# Altium PCB BOOSTXL-K350QVG-S1.PcbDoc (part 2 of 4)
Units mm, origin at the board's own origin, x right, y up, seen from the top; angles counter-clockwise.
Board outline 152.4 x 101.6 mm, 2 copper layers (Top Layer, Bottom Layer); 36 components, 58 nets, 6671 pads, 44 vias.
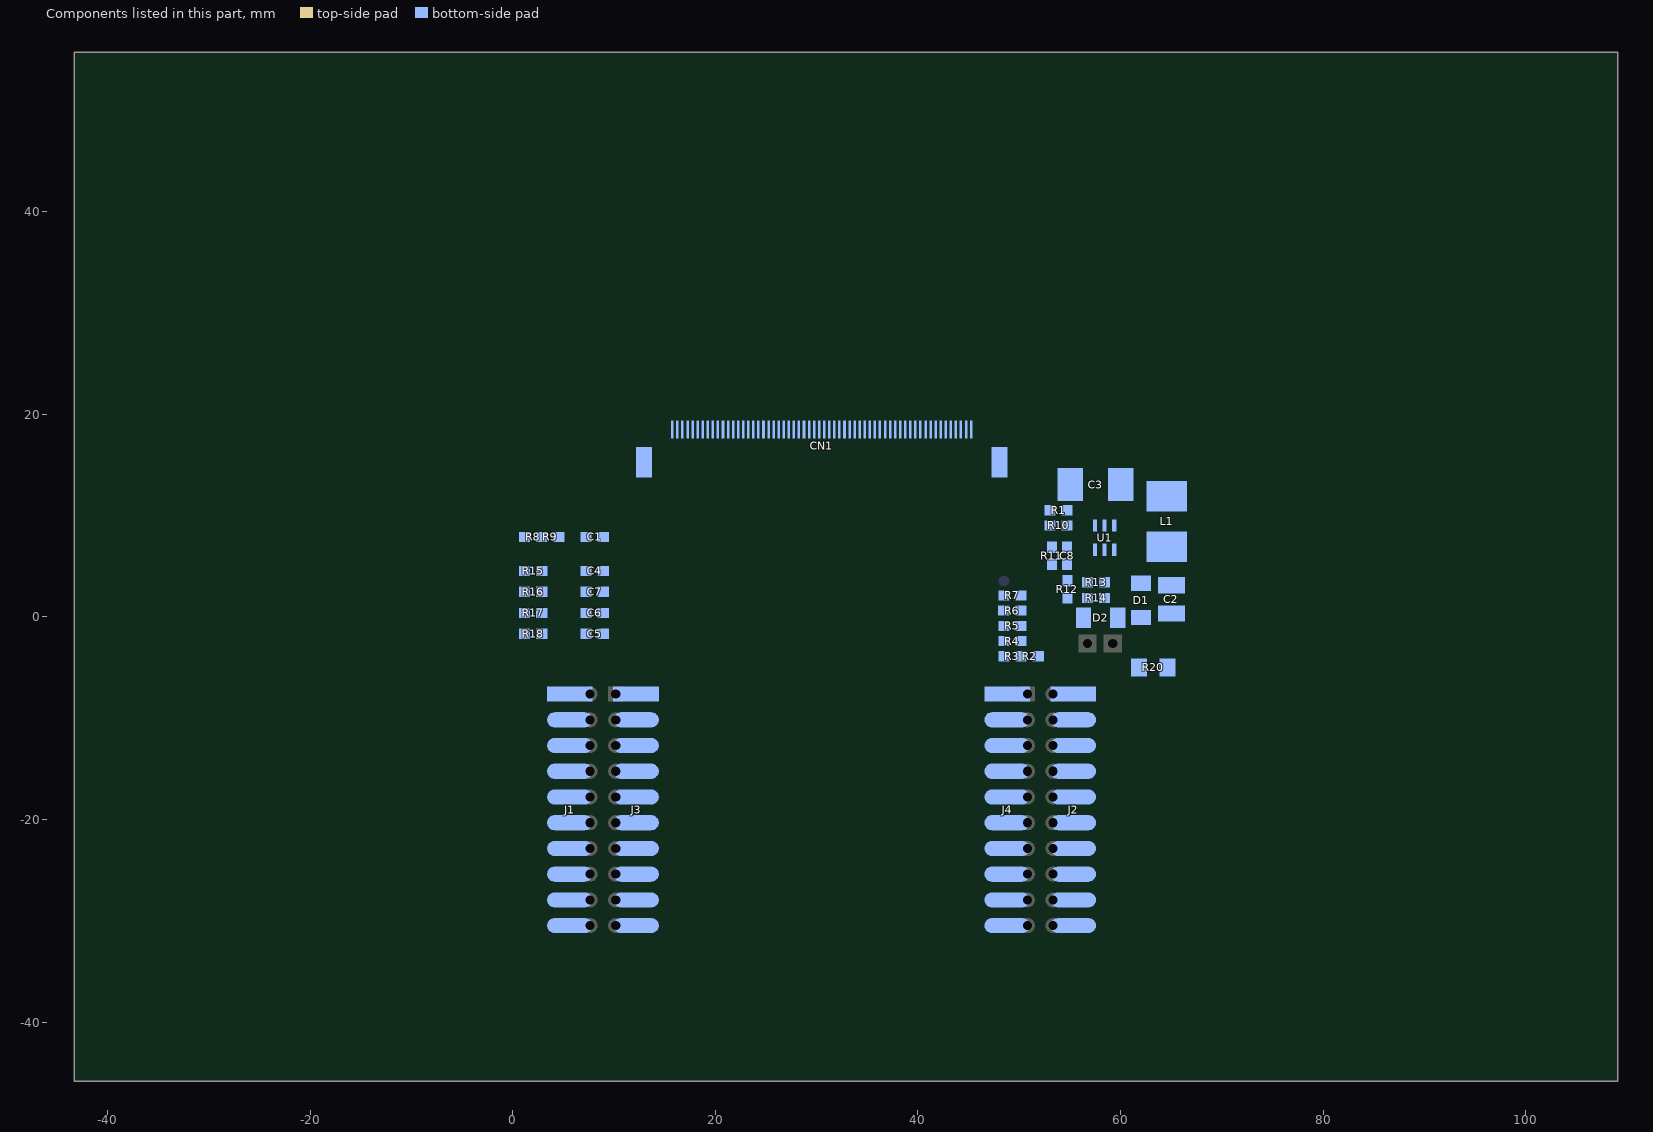
[diagram p2: the components of this part, seen from the top]

## Free pads (board coordinates) (continued)
  round 0.018 on Bottom Overlay: 1(49.907,16.987) 1(49.907,17.004) 1(49.907,17.022) 1(49.907,17.04) 1(49.925,16.969) 1(49.942,16.933) 1(49.942,16.951) 1(49.96,16.915) 1(49.978,16.898) 1(49.996,16.862) 1(49.996,16.88) 1(50.014,16.844) 1(50.031,16.809) 1(50.031,16.827) 1(50.049,16.791) 1(50.067,16.755) 1(50.067,16.773) 1(50.085,16.738) 1(50.102,16.72) 1(50.102,17.04) 1(50.12,16.684) 1(50.12,16.702) 1(50.12,17.004) 1(50.12,17.022) 1(50.138,16.667) 1(50.138,16.969) 1(50.138,16.987) 1(50.156,16.631) 1(50.156,16.649) 1(50.156,16.933) 1(50.156,16.951) 1(50.174,16.595) 1(50.174,16.613) 1(50.174,16.915) 1(50.191,16.578) 1(50.191,16.88) 1(50.191,16.898) 1(50.209,16.542) 1(50.209,16.56) 1(50.209,16.844) 1(50.209,16.862) 1(50.227,16.524) 1(50.227,16.809) 1(50.227,16.827) 1(50.245,16.489) 1(50.245,16.507) 1(50.245,16.791) 1(50.262,16.471) 1(50.262,16.755) 1(50.262,16.773) 1(50.28,15.315) 1(50.28,15.333) 1(50.28,15.351) 1(50.28,15.369) 1(50.28,15.386) 1(50.28,15.404) 1(50.28,16.435) 1(50.28,16.453) 1(50.28,16.72) 1(50.28,16.738) 1(50.298,16.4) 1(50.298,16.418) 1(50.298,16.684) 1(50.298,16.702) 1(50.316,16.382) 1(50.316,16.667) 1(50.322,18.116) 1(50.322,18.133) 1(50.322,19.574) 1(50.322,19.591) 1(50.322,19.609) 1(50.334,16.347) 1(50.334,16.364) 1(50.334,16.631) 1(50.334,16.649) 1(50.34,18.08) 1(50.34,18.098) 1(50.34,18.151) 1(50.34,19.467) 1(50.34,19.485) 1(50.34,19.502) 1(50.34,19.52) 1(50.34,19.538) 1(50.34,19.556) 1(50.351,16.329) 1(50.351,16.595) 1(50.351,16.613) 1(50.358,18.044) 1(50.358,18.062) 1(50.358,19.325) 1(50.358,19.342) 1(50.358,19.36) 1(50.358,19.378) 1(50.358,19.396) 1(50.358,19.414) 1(50.358,19.431) 1(50.358,19.449) 1(50.358,19.627) 1(50.369,16.293) 1(50.369,16.311) 1(50.369,16.578) 1(50.376,18.009) 1(50.376,18.027) 1(50.376,18.151) 1(50.376,19.182) 1(50.376,19.2) 1(50.376,19.218) 1(50.376,19.236) 1(50.376,19.254) 1(50.376,19.271) 1(50.376,19.289) 1(50.376,19.307) 1(50.387,16.258) 1(50.387,16.275) 1(50.387,16.542) 1(50.387,16.56) 1(50.394,17.991) 1(50.405,15.422) 1(50.405,16.222) 1(50.405,16.24) 1(50.405,16.507) 1(50.405,16.524) 1(50.411,18.133) 1(50.411,19.645) 1(50.422,16.204) 1(50.422,16.489) 1(50.429,17.973) 1(50.44,16.169) 1(50.44,16.187) 1(50.44,16.453) 1(50.44,16.471) 1(50.447,18.116) 1(50.458,15.44) 1(50.458,16.133) 1(50.458,16.151) 1(50.458,16.418) 1(50.458,16.435) 1(50.476,15.458) 1(50.476,15.475) 1(50.476,15.493) 1(50.476,15.511) 1(50.476,16.08) 1(50.476,16.098) 1(50.476,16.115) 1(50.476,16.4) 1(50.482,17.956) 1(50.482,19.182) 1(50.482,19.2) 1(50.482,19.218) 1(50.482,19.236) 1(50.482,19.254) 1(50.482,19.271) 1(50.482,19.289) 1(50.482,19.307) 1(50.482,19.325) 1(50.482,19.342) 1(50.482,19.36) 1(50.482,19.662) 1(50.494,15.529) 1(50.494,15.546) 1(50.494,15.564) 1(50.494,15.582) 1(50.494,15.6) 1(50.494,15.618) 1(50.494,15.635) 1(50.494,15.653) 1(50.494,15.671) 1(50.494,15.689) 1(50.494,15.706) 1(50.494,15.724) 1(50.494,15.742) 1(50.494,15.76) 1(50.494,15.778) 1(50.494,15.795) 1(50.494,15.813) 1(50.494,15.831) 1(50.494,15.849) 1(50.494,15.866) 1(50.494,15.884) 1(50.494,15.902) 1(50.494,15.92) 1(50.494,15.938) 1(50.494,15.955) 1(50.494,15.973) 1(50.494,15.991) 1(50.494,16.009) 1(50.494,16.026) 1(50.494,16.044) 1(50.494,16.062) 1(50.494,16.364) 1(50.494,16.382) 1(50.5,18.098) 1(50.5,19.378) 1(50.5,19.396) 1(50.5,19.414) 1(50.511,16.347) 1(50.518,17.938) 1(50.518,19.431) 1(50.529,16.311) 1(50.529,16.329) 1(50.536,18.08) 1(50.536,19.449) 1(50.547,16.275) 1(50.547,16.293) 1(50.554,19.467) 1(50.554,19.68) 1(50.565,16.258) 1(50.571,17.92) 1(50.589,19.485) 1(50.6,16.258) 1(50.6,16.275) 1(50.607,18.062) 1(50.607,19.502) 1(50.618,16.293) 1(50.618,16.311) 1(50.625,17.902) 1(50.625,19.698) 1(50.636,16.329) 1(50.636,16.347) 1(50.642,19.52) 1(50.654,16.364) 1(50.654,16.382) 1(50.671,16.4) 1(50.671,16.418) 1(50.678,19.538) 1(50.689,16.435) 1(50.689,16.453) 1(50.696,17.884) 1(50.696,18.044) 1(50.707,16.471) 1(50.707,16.489) 1(50.725,16.507) 1(50.725,16.524) 1(50.731,19.556) 1(50.742,16.542) 1(50.742,16.56) 1(50.76,16.578) 1(50.76,16.595) 1(50.767,19.716) 1(50.778,16.613) 1(50.778,16.631) 1(50.796,16.649) 1(50.796,16.667) 1(50.802,17.867) 1(50.814,16.684) 1(50.82,19.574) 1(50.831,16.702) 1(50.831,16.72) 1(50.849,15.529) 1(50.849,15.546) 1(50.849,15.564) 1(50.849,15.582) 1(50.849,15.6) 1(50.849,15.618) 1(50.849,15.635) 1(50.849,15.653) 1(50.849,15.671) 1(50.849,15.689) 1(50.849,15.706) 1(50.849,15.724) 1(50.849,15.742) 1(50.849,15.76) 1(50.849,15.778) 1(50.849,15.795) 1(50.849,15.813) 1(50.849,15.831) 1(50.849,15.849) 1(50.849,15.866) 1(50.849,15.884) 1(50.849,15.902) 1(50.849,15.92) 1(50.849,15.938) 1(50.849,15.955) 1(50.849,15.973) 1(50.849,15.991) 1(50.849,16.009) 1(50.849,16.026) 1(50.849,16.738) 1(50.849,16.755) 1(50.867,15.458) 1(50.867,15.475) 1(50.867,15.493) 1(50.867,15.511) 1(50.867,16.044) 1(50.867,16.062) 1(50.867,16.773) 1(50.867,16.791) 1(50.885,15.44) 1(50.885,16.08) 1(50.885,16.098) 1(50.885,16.809) 1(50.885,16.827) 1(50.903,16.115) 1(50.903,16.133) 1(50.903,16.844) 1(50.92,16.151) 1(50.92,16.169) 1(50.92,16.862) 1(50.92,16.88) 1(50.938,15.422) 1(50.938,16.187) 1(50.938,16.204) 1(50.938,16.898) 1(50.956,16.222) 1(50.956,16.24) 1(50.956,16.915) 1(50.956,16.933) 1(50.963,18.044) 1(50.974,16.258) 1(50.974,16.951) 1(50.991,16.275) 1(50.991,16.293) 1(50.991,16.969) 1(51.009,16.311) 1(51.009,16.329) 1(51.009,16.987) 1(51.009,17.004) 1(51.027,16.347) 1(51.027,17.022) 1(51.045,16.364) 1(51.045,16.382) 1(51.045,17.04) 1(51.051,18.062) 1(51.051,19.574) 1(51.063,15.315) 1(51.063,15.333) 1(51.063,15.351) 1(51.063,15.369) 1(51.063,15.386) 1(51.063,15.404) 1(51.063,16.4) 1(51.063,16.418) 1(51.08,16.435) 1(51.08,17.058) 1(51.098,16.453) 1(51.098,16.471) 1(51.098,17.076) 1(51.105,18.08) 1(51.105,19.716) 1(51.116,16.489) 1(51.116,16.507) 1(51.134,16.524) 1(51.134,17.093) 1(51.14,17.867) 1(51.14,19.556) 1(51.151,16.542) 1(51.151,16.56) 1(51.158,18.098) 1(51.169,16.578) 1(51.169,17.093) 1(51.187,16.595) 1(51.187,16.613) 1(51.194,18.116) 1(51.194,19.538) 1(51.205,16.631) 1(51.223,16.649) 1(51.223,16.667) 1(51.229,18.133) 1(51.229,19.52) 1(51.229,19.698) 1(51.24,16.684) 1(51.24,17.076) 1(51.247,17.884) 1(51.247,18.151) 1(51.258,16.702) 1(51.258,16.72) 1(51.265,18.169) 1(51.265,19.502) 1(51.276,16.738) 1(51.283,18.187) 1(51.283,19.485) 1(51.294,16.755) 1(51.3,19.68) 1(51.311,16.773) 1(51.318,17.902) 1(51.318,18.205) 1(51.318,19.467) 1(51.329,16.791) 1(51.329,16.809) 1(51.329,17.058) 1(51.336,18.222) 1(51.336,19.449) 1(51.347,16.827) 1(51.354,18.24) 1(51.354,18.258) 1(51.354,19.431) 1(51.354,19.662) 1(51.365,16.844) 1(51.371,17.92) 1(51.371,18.276) 1(51.371,19.414) 1(51.383,15.298) 1(51.383,15.315) 1(51.383,15.333) 1(51.383,15.351) 1(51.383,15.369) 1(51.383,15.386) 1(51.383,16.862) 1(51.389,18.293) 1(51.389,19.396) 1(51.4,16.88) 1(51.4,17.04) 1(51.407,18.311) 1(51.407,19.378) 1(51.407,19.645) 1(51.425,17.938) 1(51.425,18.329) 1(51.425,18.347) 1(51.425,19.36) 1(51.436,16.898) 1(51.443,18.365) 1(51.443,19.325) 1(51.443,19.342) 1(51.443,19.627) 1(51.46,17.956) 1(51.46,18.382) 1(51.46,18.4) 1(51.46,19.289) 1(51.46,19.307) 1(51.478,18.418) 1(51.478,18.436) 1(51.478,19.254) 1(51.478,19.271) 1(51.478,19.609) 1(51.489,15.404) 1(51.489,17.022) 1(51.496,17.973) 1(51.496,18.453) 1(51.496,18.471) 1(51.496,18.489) 1(51.496,19.218) 1(51.496,19.236) 1(51.514,18.507) 1(51.514,18.525) 1(51.514,18.542) 1(51.514,19.182) 1(51.514,19.2) 1(51.514,19.591) 1(51.525,15.422) 1(51.531,17.991) 1(51.531,18.56) 1(51.531,18.578) 1(51.531,18.596) 1(51.531,19.111) 1(51.531,19.129) 1(51.531,19.147) 1(51.531,19.165) 1(51.543,15.44) 1(51.543,16.915) 1(51.543,16.933) 1(51.543,16.951) 1(51.543,16.969) 1(51.543,16.987) 1(51.543,17.004) 1(51.549,18.613) 1(51.549,18.631) 1(51.549,18.649) 1(51.549,18.667) 1(51.549,18.685) 1(51.549,18.702) 1(51.549,19.022) 1(51.549,19.04) 1(51.549,19.058) 1(51.549,19.076) 1(51.549,19.094) 1(51.549,19.574) 1(51.56,15.458) 1(51.56,15.475) 1(51.567,18.009) 1(51.567,18.72) 1(51.567,18.738) 1(51.567,18.756) 1(51.567,18.773) 1(51.567,18.791) 1(51.567,18.809) 1(51.567,18.827) 1(51.567,18.845) 1(51.567,18.862) 1(51.567,18.88) 1(51.567,18.898) 1(51.567,18.916) 1(51.567,18.933) 1(51.567,18.951) 1(51.567,18.969) 1(51.567,18.987) 1(51.567,19.005) 1(51.578,15.493) 1(51.578,15.511) 1(51.585,18.027) 1(51.585,19.556) 1(51.596,15.529) 1(51.596,15.546) 1(51.603,19.538) 1(51.614,15.564) 1(51.614,15.582) 1(51.614,15.6) 1(51.62,18.044) 1(51.62,19.52) 1(51.631,15.618) 1(51.631,15.635) 1(51.638,18.062) 1(51.649,15.653) 1(51.649,15.671) 1(51.656,18.08) 1(51.656,19.502) 1(51.667,15.689) 1(51.667,15.706) 1(51.667,15.724) 1(51.674,18.098) 1(51.674,19.485) 1(51.685,15.742) 1(51.685,15.76) 1(51.691,18.116) 1(51.691,19.467) 1(51.703,15.778) 1(51.703,15.795) 1(51.709,18.133) 1(51.709,19.449) 1(51.72,15.813) 1(51.72,15.831) 1(51.727,18.151) 1(51.727,19.431) 1(51.738,15.849) 1(51.738,15.866) 1(51.738,15.884) 1(51.745,18.169) 1(51.745,19.414) 1(51.756,15.902) 1(51.756,15.92) 1(51.763,18.187) 1(51.763,18.205) 1(51.763,19.396) 1(51.774,15.938) 1(51.774,15.955) 1(51.78,18.222) 1(51.78,19.36) 1(51.78,19.378) 1(51.792,15.973) 1(51.792,15.991) 1(51.792,16.009) 1(51.798,18.24) 1(51.798,18.258) 1(51.798,19.342) 1(51.809,16.026) 1(51.809,16.044) 1(51.816,18.276) 1(51.816,19.325) 1(51.827,16.062) 1(51.827,16.08) 1(51.834,18.293) 1(51.834,18.311) 1(51.834,19.289) 1(51.834,19.307) 1(51.845,16.098) 1(51.845,16.115) 1(51.845,16.133) 1(51.852,18.329) 1(51.852,18.347) 1(51.852,19.254) 1(51.852,19.271) 1(51.863,16.151) 1(51.863,16.169) 1(51.869,18.365) 1(51.869,18.382) 1(51.869,19.218) 1(51.869,19.236) 1(51.88,16.187) 1(51.88,16.204) 1(51.887,18.4) 1(51.887,18.418) 1(51.887,18.436) 1(51.887,19.182) 1(51.887,19.2) 1(51.898,16.222) 1(51.898,16.24) 1(51.905,18.453) 1(51.905,18.471) 1(51.905,18.489) 1(51.905,19.129) 1(51.905,19.147) 1(51.905,19.165) 1(51.916,16.258) 1(51.916,16.275) 1(51.916,16.293) 1(51.923,18.507) 1(51.923,18.525) 1(51.923,18.542) 1(51.923,18.56) 1(51.923,19.058) 1(51.923,19.076) 1(51.923,19.094) 1(51.923,19.111) 1(51.934,16.311) 1(51.934,16.329) 1(51.94,18.578) 1(51.94,18.596) 1(51.94,18.613) 1(51.94,18.631) 1(51.94,18.649) 1(51.94,18.667) 1(51.94,18.969) 1(51.94,18.987) 1(51.94,19.005) 1(51.94,19.022) 1(51.94,19.04) 1(51.952,16.347) 1(51.952,16.364) 1(51.958,18.685) 1(51.958,18.702) 1(51.958,18.72) 1(51.958,18.738) 1(51.958,18.756) 1(51.958,18.773) 1(51.958,18.791) 1(51.958,18.809) 1(51.958,18.827) 1(51.958,18.845) 1(51.958,18.862) 1(51.958,18.88) 1(51.958,18.898) 1(51.958,18.916) 1(51.958,18.933) 1(51.958,18.951) 1(51.969,15.44) 1(51.969,15.458) 1(51.969,16.382) 1(51.969,16.4) 1(51.969,16.418) 1(51.987,15.422) 1(51.987,15.475) 1(51.987,15.493) 1(51.987,15.511) 1(51.987,16.435) 1(51.987,16.453) 1(52.005,15.529) 1(52.005,15.546) 1(52.005,15.564) 1(52.005,16.471) 1(52.005,16.489) 1(52.023,15.404) 1(52.023,15.582) 1(52.023,15.6) 1(52.023,16.507) 1(52.023,16.524) 1(52.023,16.542) 1(52.04,15.618) 1(52.04,15.635) 1(52.04,16.56) 1(52.04,16.578) 1(52.058,15.653) 1(52.058,15.671) 1(52.058,15.689) 1(52.058,16.595) 1(52.058,16.613) 1(52.076,15.706) 1(52.076,15.724) 1(52.076,16.631) 1(52.076,16.649) 1(52.094,15.742) 1(52.094,15.76) 1(52.094,15.778) 1(52.094,16.667) 1(52.094,16.684) 1(52.094,16.702) 1(52.112,15.795) 1(52.112,15.813) 1(52.112,16.72) 1(52.112,16.738) 1(52.129,16.755) 1(52.129,16.773) 1(52.147,16.791) 1(52.147,16.809) 1(52.147,16.827) 1(52.165,15.298) 1(52.165,15.315) 1(52.165,15.333) 1(52.165,15.351) 1(52.165,15.369) 1(52.165,15.386) 1(52.165,16.844) 1(52.165,16.862) 1(52.172,18.293) 1(52.172,18.311) 1(52.172,18.329) 1(52.183,15.973) 1(52.183,15.991) 1(52.183,16.88) 1(52.183,16.898) 1(52.189,18.151) 1(52.189,18.169) 1(52.189,18.187) 1(52.189,18.205) 1(52.189,18.222) 1(52.189,18.24) 1(52.189,18.258) 1(52.189,18.276) 1(52.2,16.009) 1(52.2,16.026) 1(52.2,16.915) 1(52.2,16.933) 1(52.2,16.951) 1(52.207,17.92) 1(52.207,17.938) 1(52.207,17.956) 1(52.207,17.973) 1(52.207,17.991) 1(52.207,18.009) 1(52.207,18.027) 1(52.207,18.044) 1(52.207,18.062) 1(52.207,18.08) 1(52.207,18.098) 1(52.207,18.116) 1(52.207,18.133) 1(52.218,16.044) 1(52.218,16.062) 1(52.218,16.969) 1(52.218,16.987) 1(52.236,16.08) 1(52.236,16.098) 1(52.236,16.115) 1(52.236,17.004) 1(52.236,17.022) 1(52.243,19.591) 1(52.243,19.609) 1(52.243,19.627) 1(52.243,19.645) 1(52.243,19.662) 1(52.254,16.133) 1(52.254,16.151) 1(52.26,19.431) 1(52.26,19.449) 1(52.26,19.467) 1(52.26,19.485) 1(52.26,19.502) 1(52.26,19.52) 1(52.26,19.538) 1(52.26,19.556) 1(52.26,19.574) 1(52.272,16.169) 1(52.272,16.187) 1(52.272,16.204) 1(52.278,18.293) 1(52.278,18.311) 1(52.278,18.329) 1(52.278,19.289) 1(52.278,19.307) 1(52.278,19.325) 1(52.278,19.342) 1(52.278,19.36) 1(52.278,19.378) 1(52.278,19.396) 1(52.278,19.414) 1(52.289,16.222) 1(52.289,16.24) 1(52.296,18.187) 1(52.296,18.205) 1(52.296,18.222) 1(52.296,18.24) 1(52.296,18.258) 1(52.296,18.276) 1(52.307,16.258) 1(52.307,16.275) 1(52.314,18.116) 1(52.314,18.133) 1(52.314,18.151) 1(52.314,18.169) 1(52.325,16.293) 1(52.325,16.311) 1(52.325,16.329) 1(52.332,18.098) 1(52.343,16.347) 1(52.343,16.364) 1(52.36,16.382) 1(52.36,16.4) 1(52.36,16.418) 1(52.367,18.08) 1(52.378,16.435) 1(52.378,16.453) 1(52.385,19.289) 1(52.385,19.307) 1(52.385,19.325) 1(52.385,19.342) 1(52.385,19.36) 1(52.385,19.378) 1(52.385,19.396) 1(52.385,19.414) 1(52.385,19.431) 1(52.385,19.449) 1(52.396,16.471) 1(52.396,16.489) 1(52.403,18.542) 1(52.403,18.56) 1(52.403,18.578) 1(52.403,18.596) 1(52.403,18.613) 1(52.403,18.631) 1(52.403,18.649) 1(52.403,18.667) 1(52.403,18.685) 1(52.403,18.702) 1(52.403,18.72) 1(52.403,18.738) 1(52.403,18.756) 1(52.403,18.773) 1(52.403,18.791) 1(52.403,18.809) 1(52.403,18.827) 1(52.403,18.845) 1(52.403,18.862) 1(52.403,18.88) 1(52.403,18.898) 1(52.403,18.916) 1(52.403,18.933) 1(52.403,18.951) 1(52.403,18.969) 1(52.403,18.987) 1(52.403,19.005) 1(52.403,19.022) 1(52.403,19.04) 1(52.403,19.058) 1(52.403,19.076) 1(52.403,19.094) 1(52.403,19.467) 1(52.403,19.485) 1(52.414,16.507) 1(52.414,16.524) 1(52.414,16.542) 1(52.42,19.502) 1(52.432,16.56) 1(52.432,16.578) 1(52.432,16.987) 1(52.432,17.004) 1(52.432,17.022) 1(52.449,16.542) 1(52.449,16.56) 1(52.449,16.578) 1(52.449,16.951) 1(52.449,16.969) 1(52.467,16.507) 1(52.467,16.524) 1(52.467,16.898) 1(52.467,16.915) 1(52.467,16.933) 1(52.474,18.062) 1(52.485,16.453) 1(52.485,16.471) 1(52.485,16.489) 1(52.485,16.862) 1(52.485,16.88) 1(52.503,16.418) 1(52.503,16.435) 1(52.503,16.809) 1(52.503,16.827) 1(52.503,16.844) 1(52.509,18.542) 1(52.509,18.56) 1(52.509,18.578) 1(52.509,18.596) 1(52.509,18.613) 1(52.509,18.631) 1(52.509,18.649) 1(52.509,18.667) 1(52.509,18.685) 1(52.509,18.987) 1(52.509,19.005) 1(52.509,19.022) 1(52.509,19.04) 1(52.509,19.058) 1(52.509,19.076) 1(52.509,19.094) 1(52.52,16.364) 1(52.52,16.382) 1(52.52,16.4) 1(52.52,16.755) 1(52.52,16.773) 1(52.52,16.791) 1(52.527,18.702) 1(52.527,18.72) 1(52.527,18.933) 1(52.527,18.951) 1(52.527,18.969) 1(52.538,16.329) 1(52.538,16.347) 1(52.538,16.72) 1(52.538,16.738) 1(52.545,18.738) 1(52.545,19.52) 1(52.556,16.275) 1(52.556,16.293) 1(52.556,16.311) 1(52.556,16.684) 1(52.556,16.702) 1(52.563,18.916) 1(52.574,16.24) 1(52.574,16.258) 1(52.574,16.631) 1(52.574,16.649) 1(52.574,16.667) 1(52.592,16.204) 1(52.592,16.222) 1(52.592,16.595) 1(52.592,16.613) 1(52.609,16.151) 1(52.609,16.169) 1(52.609,16.187) 1(52.609,16.542) 1(52.609,16.56) 1(52.609,16.578) 1(52.616,18.756) 1(52.627,16.115) 1(52.627,16.133) 1(52.627,16.507) 1(52.627,16.524) 1(52.645,16.062) 1(52.645,16.08) 1(52.645,16.098) 1(52.645,16.453) 1(52.645,16.471) 1(52.645,16.489) 1(52.663,16.026) 1(52.663,16.044) 1(52.663,16.418) 1(52.663,16.435) 1(52.681,15.298) 1(52.681,15.315) 1(52.681,15.333) 1(52.681,15.351) 1(52.681,15.369) 1(52.681,15.386) 1(52.681,15.973) 1(52.681,15.991) 1(52.681,16.009) 1(52.681,16.364) 1(52.681,16.382) 1(52.681,16.4) 1(52.698,16.329) 1(52.698,16.347) 1(52.716,16.293) 1(52.716,16.311) 1(52.734,16.24) 1(52.734,16.258) 1(52.734,16.275) 1(52.752,15.795) 1(52.752,15.813) 1(52.752,16.204) 1(52.752,16.222) 1(52.769,15.76) 1(52.769,15.778) 1(52.769,16.151) 1(52.769,16.169) 1(52.769,16.187) 1(52.787,15.706) 1(52.787,15.724) 1(52.787,15.742) 1(52.787,16.115) 1(52.787,16.133) 1(52.805,15.404) 1(52.805,15.671) 1(52.805,15.689) 1(52.805,16.062) 1(52.805,16.08) 1(52.805,16.098) 1(52.823,15.618) 1(52.823,15.635) 1(52.823,15.653) 1(52.823,16.026) 1(52.823,16.044) 1(52.841,15.564) 1(52.841,15.582) 1(52.841,15.6) 1(52.841,15.973) 1(52.841,15.991) 1(52.841,16.009) 1(52.858,15.422) 1(52.858,15.493) 1(52.858,15.511) 1(52.858,15.529) 1(52.858,15.546) 1(52.858,15.938) 1(52.858,15.955) 1(52.876,15.44) 1(52.876,15.458) 1(52.876,15.475) 1(52.876,15.902) 1(52.876,15.92) 1(52.894,15.849) 1(52.894,15.866) 1(52.894,15.884) 1(52.912,15.813) 1(52.912,15.831) 1(52.929,15.76) 1(52.929,15.778) 1(52.929,15.795) 1(52.947,15.724) 1(52.947,15.742) 1(52.954,19.485) 1(52.954,19.502) 1(52.954,19.52) 1(52.965,15.689) 1(52.965,15.706) 1(52.972,18.062) 1(52.972,18.08) 1(52.972,18.098) 1(52.972,18.116) 1(52.972,18.133) 1(52.972,18.151) 1(52.972,18.169) 1(52.972,18.187) 1(52.972,18.205) 1(52.972,18.222) 1(52.972,18.24) 1(52.972,18.258) 1(52.972,18.276) 1(52.972,18.293) 1(52.972,18.311) 1(52.972,18.329) 1(52.972,18.347) 1(52.972,18.365) 1(52.972,18.382) 1(52.972,18.4) 1(52.972,18.418) 1(52.972,18.436) 1(52.972,18.453) 1(52.972,18.471) 1(52.972,18.489) 1(52.972,18.507) 1(52.972,18.525) 1(52.972,18.542) 1(52.972,18.56) 1(52.972,18.578) 1(52.972,18.596) 1(52.972,18.613) 1(52.972,18.631) 1(52.972,18.649) 1(52.972,18.667) 1(52.972,18.685) 1(52.972,18.702) 1(52.972,18.72) 1(52.972,18.738) 1(52.972,18.756) 1(52.972,18.916) 1(52.972,18.933) 1(52.972,18.951) 1(52.972,18.969) 1(52.972,18.987) 1(52.972,19.005) 1(52.972,19.022) 1(52.972,19.04) 1(52.972,19.058) 1(52.972,19.076) 1(52.972,19.094) 1(52.972,19.111) 1(52.972,19.129) 1(52.972,19.147) 1(52.972,19.165) 1(52.972,19.182) 1(52.972,19.2) 1(52.972,19.218) 1(52.972,19.236) 1(52.972,19.254) 1(52.972,19.271) 1(52.972,19.289) 1(52.972,19.307) 1(52.972,19.325) 1(52.972,19.342) 1(52.972,19.36) 1(52.972,19.378) 1(52.972,19.396) 1(52.972,19.414) 1(52.972,19.431) 1(52.972,19.449) 1(52.972,19.467) 1(52.983,15.635) 1(52.983,15.653) 1(52.983,15.671) 1(53.001,15.6) 1(53.001,15.618) 1(53.018,15.564) 1(53.018,15.582) 1(53.036,15.511) 1(53.036,15.529) 1(53.036,15.546) 1(53.054,15.475) 1(53.054,15.493) 1(53.072,15.458) 1(53.089,15.44) 1(53.107,15.422) 1(53.161,15.404) 1(53.249,15.298) 1(53.249,15.315) 1(53.249,15.333) 1(53.249,15.351) 1(53.249,15.369) 1(53.249,15.386) 1(53.327,18.098) 1(53.327,18.116) 1(53.327,18.133) 1(53.327,18.151) 1(53.327,18.169) 1(53.327,18.187) 1(53.327,18.205) 1(53.327,18.222) 1(53.327,18.24) 1(53.327,18.258) 1(53.327,18.276) 1(53.327,18.293) 1(53.327,18.311) 1(53.327,18.329) 1(53.327,18.347) 1(53.327,18.365) 1(53.327,18.382) 1(53.327,18.4) 1(53.327,18.418) 1(53.327,18.436) 1(53.327,18.453) 1(53.327,18.471) 1(53.327,18.489) 1(53.327,18.507) 1(53.327,18.525) 1(53.327,18.542) 1(53.327,18.56) 1(53.327,18.578) 1(53.327,18.596) 1(53.327,18.613) 1(53.327,18.631) 1(53.327,18.649) 1(53.327,18.667) 1(53.327,18.685) 1(53.327,18.702) 1(53.327,18.72) 1(53.327,18.738) 1(53.327,18.756) 1(53.327,18.773) 1(53.327,18.791) 1(53.327,18.809) 1(53.327,18.827) 1(53.327,18.845) 1(53.327,18.862) 1(53.327,18.88) 1(53.327,18.898) 1(53.327,18.916) 1(53.327,18.933) 1(53.327,18.951) 1(53.327,18.969) 1(53.327,18.987) 1(53.327,19.005) 1(53.327,19.022) 1(53.327,19.04) 1(53.327,19.058) 1(53.327,19.076) 1(53.327,19.094) 1(53.327,19.111) 1(53.327,19.129) 1(53.327,19.147) 1(53.327,19.165) 1(53.327,19.182) 1(53.327,19.2) 1(53.327,19.218) 1(53.327,19.236) 1(53.327,19.254) 1(53.327,19.271) 1(53.327,19.289) 1(53.327,19.307) 1(53.327,19.325) 1(53.327,19.342) 1(53.327,19.36) 1(53.327,19.378) 1(53.327,19.396) 1(53.327,19.414) 1(53.327,19.431) 1(53.345,18.027) 1(53.345,18.044) 1(53.345,18.062) 1(53.345,18.08) 1(53.345,19.449) 1(53.345,19.467) 1(53.345,19.485) 1(53.345,19.502) 1(53.345,19.52) 1(53.363,19.538) 1(53.374,15.671) 1(53.374,15.689) 1(53.374,15.706) 1(53.381,18.009) 1(53.392,15.529) 1(53.392,15.546) 1(53.392,15.564) 1(53.392,15.582) 1(53.392,15.6) 1(53.392,15.618) 1(53.392,15.635) 1(53.392,15.653) 1(53.398,17.991) 1(53.409,15.298) 1(53.409,15.315) 1(53.409,15.333) 1(53.409,15.351) 1(53.409,15.369) 1(53.409,15.386) 1(53.409,15.404) 1(53.409,15.422) 1(53.409,15.44) 1(53.409,15.458) 1(53.409,15.475) 1(53.409,15.493) 1(53.409,15.511) 1(53.416,19.556) 1(53.434,17.973) 1(53.452,17.92) 1(53.452,17.938) 1(53.452,17.956) 1(53.481,15.671) 1(53.481,15.689) 1(53.481,15.706) 1(53.498,15.564) 1(53.498,15.582) 1(53.498,15.6) 1(53.498,15.618) 1(53.498,15.635) 1(53.498,15.653) 1(53.516,15.493) 1(53.516,15.511) 1(53.516,15.529) 1(53.516,15.546) 1(53.534,15.475) 1(53.541,19.574) 1(53.541,19.591) 1(53.541,19.609) 1(53.541,19.627) 1(53.541,19.645) 1(53.541,19.662) 1(53.57,15.458) 1(53.676,15.44) 1(53.683,19.591) 1(53.683,19.609) 1(53.683,19.627) 1(53.683,19.645) 1(53.683,19.662) 1(53.701,19.271) 1(53.701,19.289) 1(53.701,19.307) 1(53.701,19.325) 1(53.701,19.342) 1(53.701,19.36) 1(53.701,19.378) 1(53.701,19.396) 1(53.701,19.414) 1(53.701,19.431) 1(53.701,19.449) 1(53.701,19.467) 1(53.701,19.485) 1(53.701,19.502) 1(53.701,19.52) 1(53.701,19.538) 1(53.701,19.556) 1(53.701,19.574) 1(53.807,19.271) 1(53.807,19.289) 1(53.807,19.307) 1(53.807,19.325) 1(53.807,19.342) 1(53.807,19.36) 1(53.807,19.378) 1(53.807,19.396) 1(53.807,19.414) 1(53.807,19.431) 1(53.825,19.449) 1(53.825,19.467) 1(53.825,19.485) 1(53.843,19.502) 1(53.878,19.52) 1(53.961,16.933) 1(53.961,16.951) 1(53.961,16.969) 1(53.961,16.987) 1(53.961,17.004) 1(53.961,17.022) 1(54.085,16.915) 1(54.092,17.92) 1(54.092,17.938) 1(54.092,17.956) 1(54.092,17.973) 1(54.092,17.991) 1(54.092,18.009) 1(54.138,16.898) 1(54.156,16.827) 1(54.156,16.844) 1(54.156,16.862) 1(54.156,16.88) 1(54.174,15.44) 1(54.174,15.458) 1(54.174,15.475) 1(54.174,15.493) 1(54.174,15.511) 1(54.174,15.529) 1(54.174,15.546) 1(54.174,15.564) 1(54.174,15.582) 1(54.174,15.6) 1(54.174,15.618) 1(54.174,15.635) 1(54.174,15.653) 1(54.174,15.671) 1(54.174,15.689) 1(54.174,15.706) 1(54.174,15.724) 1(54.174,15.742) 1(54.174,15.76) 1(54.174,15.778) 1(54.174,15.795) 1(54.174,15.813) 1(54.174,15.831) 1(54.174,15.849) 1(54.174,15.866) 1(54.174,15.884) 1(54.174,15.902) 1(54.174,15.92) 1(54.174,15.938) 1(54.174,15.955) 1(54.174,15.973) 1(54.174,15.991) 1(54.174,16.009) 1(54.174,16.026) 1(54.174,16.044) 1(54.174,16.062) 1(54.174,16.08) 1(54.174,16.098) 1(54.174,16.115) 1(54.174,16.133) 1(54.174,16.151) 1(54.174,16.169) 1(54.174,16.187) 1(54.174,16.204) 1(54.174,16.222) 1(54.174,16.24) 1(54.174,16.258) 1(54.174,16.275) 1(54.174,16.293) 1(54.174,16.311) 1(54.174,16.329) 1(54.174,16.347) 1(54.174,16.364) 1(54.174,16.382) 1(54.174,16.4) 1(54.174,16.418) 1(54.174,16.435) 1(54.174,16.453) 1(54.174,16.471) 1(54.174,16.489) 1(54.174,16.507) 1(54.174,16.524) 1(54.174,16.542) 1(54.174,16.56) 1(54.174,16.578) 1(54.174,16.595) 1(54.174,16.613) 1(54.174,16.631) 1(54.174,16.649) 1(54.174,16.667) 1(54.174,16.684) 1(54.174,16.702) 1(54.174,16.72) 1(54.174,16.738) 1(54.174,16.755) 1(54.174,16.773) 1(54.174,16.791) 1(54.174,16.809) 1(54.216,18.027) 1(54.27,18.044) 1(54.287,18.062) 1(54.287,18.08) 1(54.287,18.098) 1(54.287,18.116) 1(54.287,18.133) 1(54.305,18.151) 1(54.305,18.169) 1(54.305,18.187) 1(54.305,18.205) 1(54.305,18.222) 1(54.305,18.24) 1(54.305,18.258) 1(54.305,18.276) 1(54.305,18.293) 1(54.305,18.311) 1(54.305,18.329) 1(54.305,18.347) 1(54.305,18.365) 1(54.305,18.382) 1(54.305,18.4) 1(54.305,18.418) 1(54.305,18.436) 1(54.305,18.453) 1(54.305,18.471) 1(54.305,18.489) 1(54.305,18.507) 1(54.305,18.525) 1(54.305,18.542) 1(54.305,18.56) 1(54.305,18.578) 1(54.305,18.596) 1(54.305,18.613) 1(54.305,18.631) 1(54.305,18.649) 1(54.305,18.667) 1(54.305,18.685) 1(54.305,18.702) 1(54.305,18.72) 1(54.305,18.738) 1(54.305,18.756) 1(54.305,18.773) 1(54.305,18.791) 1(54.305,18.809) 1(54.305,18.827) 1(54.305,18.845) 1(54.305,18.862) 1(54.305,18.88) 1(54.305,18.898) 1(54.305,18.916) 1(54.305,18.933) 1(54.305,18.951) 1(54.305,18.969) 1(54.305,18.987) 1(54.305,19.005) 1(54.305,19.022) 1(54.305,19.04) 1(54.305,19.058) 1(54.305,19.076) 1(54.305,19.094) 1(54.305,19.111) 1(54.305,19.129) 1(54.305,19.147) 1(54.305,19.165) 1(54.305,19.182) 1(54.305,19.2) 1(54.305,19.218) 1(54.305,19.236) 1(54.305,19.254) 1(54.305,19.271) 1(54.305,19.289) 1(54.305,19.307) 1(54.305,19.325) 1(54.305,19.342) 1(54.305,19.36) 1(54.305,19.378) 1(54.305,19.396) 1(54.305,19.414) 1(54.305,19.431) 1(54.305,19.449) 1(54.305,19.467) 1(54.305,19.485) 1(54.305,19.502) 1(54.305,19.52) 1(54.53,15.475) 1(54.53,15.493) 1(54.53,15.511) 1(54.53,15.529) 1(54.53,15.546) 1(54.53,15.564) 1(54.53,15.582) 1(54.53,15.6) 1(54.53,15.618) 1(54.53,15.635) 1(54.53,15.653) 1(54.53,15.671) 1(54.53,15.689) 1(54.53,15.706) 1(54.53,15.724) 1(54.53,15.742) 1(54.53,15.76) 1(54.53,15.778) 1(54.53,15.795) 1(54.53,15.813) 1(54.53,15.831) 1(54.53,15.849) 1(54.53,15.866) 1(54.53,15.884) 1(54.53,15.902) 1(54.53,15.92) 1(54.53,15.938) 1(54.53,15.955) 1(54.53,15.973) 1(54.53,15.991) 1(54.53,16.009) 1(54.53,16.026) 1(54.53,16.044) 1(54.53,16.062) 1(54.53,16.08) 1(54.53,16.098) 1(54.53,16.115) 1(54.53,16.133) 1(54.53,16.151) 1(54.53,16.169) 1(54.53,16.187) 1(54.53,16.204) 1(54.53,16.222) 1(54.53,16.24) 1(54.53,16.258) 1(54.53,16.275) 1(54.53,16.293) 1(54.53,16.311) 1(54.53,16.329) 1(54.53,16.347) 1(54.53,16.364) 1(54.53,16.382) 1(54.53,16.4) 1(54.53,16.418) 1(54.53,16.435) 1(54.53,16.453) 1(54.53,16.471) 1(54.53,16.489) 1(54.53,16.507) 1(54.53,16.524) 1(54.53,16.542) 1(54.53,16.56) 1(54.53,16.578) 1(54.53,16.595) 1(54.53,16.613) 1(54.53,16.631) 1(54.53,16.649) 1(54.53,16.667) 1(54.53,16.684) 1(54.53,16.702) 1(54.53,16.72) 1(54.53,16.738) 1(54.53,16.755) 1(54.53,16.773) 1(54.53,16.791) 1(54.547,15.404) 1(54.547,15.422) 1(54.547,15.44) 1(54.547,15.458) 1(54.547,16.809) 1(54.547,16.827) 1(54.547,16.844) 1(54.547,16.862) 1(54.547,16.88) 1(54.565,16.898) 1(54.583,15.386) 1(54.601,15.369) 1(54.619,16.915) 1(54.636,15.351) 1(54.654,15.298) 1(54.654,15.315) 1(54.654,15.333) 1(54.661,18.151) 1(54.661,18.169) 1(54.661,18.187) 1(54.661,18.205) 1(54.661,18.222) 1(54.661,18.24) 1(54.661,18.258) 1(54.661,18.276) 1(54.661,18.293) 1(54.661,18.311) 1(54.661,18.329) 1(54.661,18.347) 1(54.661,18.365) 1(54.661,18.382) 1(54.661,18.4) 1(54.661,18.418) 1(54.661,18.436) 1(54.661,18.453) 1(54.661,18.471) 1(54.661,18.489) 1(54.661,18.507) 1(54.661,18.525) 1(54.661,18.542) 1(54.661,18.56) 1(54.661,18.578) 1(54.661,18.596) 1(54.661,18.613) 1(54.661,18.631) 1(54.661,18.649) 1(54.661,18.667) 1(54.661,18.685) 1(54.661,18.702) 1(54.661,18.72) 1(54.661,18.738) 1(54.661,18.756) 1(54.661,18.773) 1(54.661,18.791) 1(54.661,18.809) 1(54.661,18.827) 1(54.661,18.845) 1(54.661,18.862) 1(54.661,18.88) 1(54.661,18.898) 1(54.661,18.916) 1(54.661,18.933) 1(54.661,18.951) 1(54.661,18.969) 1(54.661,18.987) 1(54.661,19.005) 1(54.661,19.022) 1(54.661,19.04) 1(54.661,19.058) 1(54.661,19.076) 1(54.661,19.094) 1(54.661,19.111) 1(54.661,19.129) 1(54.661,19.147) 1(54.661,19.165) 1(54.661,19.182) 1(54.661,19.2) 1(54.661,19.218) 1(54.661,19.236) 1(54.661,19.254) 1(54.661,19.271) 1(54.661,19.289) 1(54.661,19.307) 1(54.661,19.325) 1(54.661,19.342) 1(54.661,19.36) 1(54.661,19.378) 1(54.661,19.396) 1(54.661,19.414) 1(54.661,19.431) 1(54.661,19.449) 1(54.661,19.467) 1(54.661,19.485) 1(54.661,19.502) 1(54.661,19.52) 1(54.679,18.062) 1(54.679,18.08) 1(54.679,18.098) 1(54.679,18.116) 1(54.679,18.133) 1(54.696,18.044) 1(54.743,16.933) 1(54.743,16.951) 1(54.743,16.969) 1(54.743,16.987) 1(54.743,17.004) 1(54.743,17.022) 1(54.75,18.027) 1(54.874,17.92) 1(54.874,17.938) 1(54.874,17.956) 1(54.874,17.973) 1(54.874,17.991) 1(54.874,18.009) 1(54.903,16.542) 1(54.903,16.56) 1(54.903,16.578) 1(54.903,16.595) 1(54.903,16.613) 1(54.903,16.631) 1(54.903,16.649) 1(54.903,16.667) 1(54.903,16.684) 1(54.903,16.702) 1(54.903,16.72) 1(54.903,16.738) 1(54.921,16.471) 1(54.921,16.489) 1(54.921,16.507) 1(54.921,16.524) 1(54.921,16.755) 1(54.921,16.773) 1(54.921,16.791) 1(54.939,16.418) 1(54.939,16.435) 1(54.939,16.453) 1(54.939,16.809) 1(54.939,16.827) 1(54.939,16.844) 1(54.956,16.382) 1(54.956,16.4) 1(54.956,16.862) 1(54.974,16.364) 1(54.974,16.88) 1(54.974,16.898) 1(54.992,16.329) 1(54.992,16.347) 1(54.992,16.915) 1(55.01,16.311) 1(55.01,16.933) 1(55.027,16.293) 1(55.045,16.275) 1(55.045,16.951) 1(55.063,16.258) 1(55.063,16.969) 1(55.07,19.52) 1(55.081,16.24) 1(55.116,16.222) 1(55.116,16.987) 1(55.123,19.502) 1(55.134,16.204) 1(55.141,19.414) 1(55.141,19.431) 1(55.141,19.449) 1(55.141,19.467) 1(55.141,19.485) 1(55.159,19.271) 1(55.159,19.289) 1(55.159,19.307) 1(55.159,19.325) 1(55.159,19.342) 1(55.159,19.36) 1(55.159,19.378) 1(55.159,19.396) 1(55.17,16.187) 1(55.17,17.004) 1(55.187,16.169) 1(55.241,16.151) 1(55.241,17.022) 1(55.259,16.471) 1(55.259,16.489) 1(55.259,16.507) 1(55.259,16.524) 1(55.259,16.542) 1(55.259,16.56) 1(55.259,16.578) 1(55.259,16.595) 1(55.259,16.613) 1(55.259,16.631) 1(55.259,16.649) 1(55.265,19.271) 1(55.265,19.289) 1(55.265,19.307) 1(55.265,19.325) 1(55.265,19.342) 1(55.265,19.36) 1(55.265,19.378) 1(55.265,19.396) 1(55.265,19.414) 1(55.265,19.431) 1(55.265,19.449) 1(55.265,19.467) 1(55.265,19.485) 1(55.265,19.502) 1(55.265,19.52) 1(55.265,19.538) 1(55.265,19.556) 1(55.265,19.574) 1(55.276,16.133) 1(55.276,16.4) 1(55.276,16.418) 1(55.276,16.435) 1(55.276,16.453) 1(55.276,16.667) 1(55.276,16.684) 1(55.276,16.702) 1(55.276,16.72) 1(55.283,19.591) 1(55.283,19.609) 1(55.283,19.627) 1(55.283,19.645) 1(55.283,19.662) 1(55.294,16.364) 1(55.294,16.382) 1(55.294,16.738) 1(55.294,16.755) 1(55.312,16.347) 1(55.312,16.773) 1(55.33,16.311) 1(55.33,16.329) 1(55.33,16.791) 1(55.33,16.809) 1(55.348,16.115) 1(55.348,16.293) 1(55.365,16.827) 1(55.383,16.275) 1(55.383,16.844) 1(55.401,16.258) 1(55.408,19.574) 1(55.408,19.591) 1(55.408,19.609) 1(55.408,19.627) 1(55.408,19.645) 1(55.408,19.662) 1(55.419,16.862) 1(55.454,16.24) 1(55.472,15.298) 1(55.472,15.315) 1(55.472,15.333) 1(55.472,15.351) 1(55.472,15.369) 1(55.472,15.386) 1(55.472,16.88) 1(55.532,19.556) 1(55.561,16.115) 1(55.585,19.538) 1(55.596,16.24) 1(55.603,17.884) 1(55.603,17.902) 1(55.603,17.92) 1(55.603,17.938) 1(55.603,17.956) 1(55.603,17.973) 1(55.603,17.991) 1(55.603,18.009) 1(55.603,19.449) 1(55.603,19.467) 1(55.603,19.485) 1(55.603,19.502) 1(55.603,19.52) 1(55.614,16.133) 1(55.614,16.151) 1(55.621,18.027) 1(55.621,18.044) 1(55.621,18.062) 1(55.621,18.08) 1(55.621,18.098) 1(55.621,18.116) 1(55.621,18.133) 1(55.621,18.151) 1(55.621,18.169) 1(55.621,18.187) 1(55.621,18.205) 1(55.621,18.222) 1(55.621,18.24) 1(55.621,18.258) 1(55.621,18.276) 1(55.621,18.293) 1(55.621,18.311) 1(55.621,18.329) 1(55.621,18.347) 1(55.621,18.365) 1(55.621,18.382) 1(55.621,18.4) 1(55.621,18.418) 1(55.621,18.436) 1(55.621,18.453) 1(55.621,18.471) 1(55.621,18.489) 1(55.621,18.507) 1(55.621,18.525) 1(55.621,18.542) 1(55.621,18.56) 1(55.621,18.578) 1(55.621,18.596) 1(55.621,18.613) 1(55.621,18.631) 1(55.621,18.649) 1(55.621,18.667) 1(55.621,18.685) 1(55.621,18.702) 1(55.621,18.72) 1(55.621,18.738) 1(55.621,18.756) 1(55.621,18.773) 1(55.621,18.791) 1(55.621,18.809) 1(55.621,18.827) 1(55.621,18.845) 1(55.621,18.862) 1(55.621,18.88) 1(55.621,18.898) 1(55.621,18.916) 1(55.621,18.933) 1(55.621,18.951) 1(55.621,18.969) 1(55.621,18.987) 1(55.621,19.005) 1(55.621,19.022) 1(55.621,19.04) 1(55.621,19.058) 1(55.621,19.076) 1(55.621,19.094) 1(55.621,19.111) 1(55.621,19.129) 1(55.621,19.147) 1(55.621,19.165) 1(55.621,19.182) 1(55.621,19.2) 1(55.621,19.218) 1(55.621,19.236) 1(55.621,19.254) 1(55.621,19.271) 1(55.621,19.289) 1(55.621,19.307) 1(55.621,19.325) 1(55.621,19.342) 1(55.621,19.36) 1(55.621,19.378) 1(55.621,19.396) 1(55.621,19.414) 1(55.621,19.431) 1(55.632,15.404) 1(55.632,16.169) 1(55.632,16.187) 1(55.632,16.24) 1(55.65,16.204) 1(55.65,16.222) 1(55.668,16.88) 1(55.674,17.884) 1(55.685,15.422) 1(55.703,15.44) 1(55.703,15.458) 1(55.703,15.475) 1(55.703,15.493) 1(55.703,15.511) 1(55.721,15.529) 1(55.721,15.546) 1(55.721,15.564) 1(55.721,15.582) 1(55.721,15.6) 1(55.721,15.618) 1(55.721,15.635) 1(55.721,15.653) 1(55.721,15.671) 1(55.721,15.689) 1(55.721,15.706) 1(55.721,15.724) 1(55.721,15.742) 1(55.721,15.76) 1(55.721,15.778) 1(55.721,15.795) 1(55.721,15.813) 1(55.721,15.831) 1(55.721,15.849) 1(55.721,15.866) 1(55.721,15.884) 1(55.721,15.902) 1(55.721,15.92) 1(55.721,15.938) 1(55.721,15.955) 1(55.721,15.973) 1(55.721,15.991) 1(55.721,16.009) 1(55.721,16.026) 1(55.721,16.044) 1(55.721,16.062) 1(55.721,16.08) 1(55.721,16.098) 1(55.721,16.115) 1(55.721,16.133) 1(55.721,16.151) 1(55.721,16.169) 1(55.721,16.187) 1(55.721,16.204) 1(55.721,16.222) 1(55.721,16.24) 1(55.721,16.258) 1(55.721,16.275) 1(55.721,16.293) 1(55.721,16.311) 1(55.721,16.329) 1(55.721,16.347) 1(55.721,16.364) 1(55.721,16.382) 1(55.721,16.4) 1(55.721,16.418) 1(55.721,16.435) 1(55.721,16.453) 1(55.721,16.471) 1(55.721,16.489) 1(55.721,16.507) 1(55.721,16.524) 1(55.721,16.542) 1(55.721,16.56) 1(55.721,16.578) 1(55.721,16.595) 1(55.721,16.613) 1(55.721,16.631) 1(55.721,16.649) 1(55.721,16.667) 1(55.721,16.684) 1(55.721,16.702) 1(55.721,16.72) 1(55.721,16.738) 1(55.721,16.755) 1(55.721,16.773) 1(55.721,16.791) 1(55.721,16.809) 1(55.721,16.827) 1(55.721,16.844) 1(55.721,16.862) 1(55.763,18.436) 1(55.763,18.453) 1(55.763,18.471) 1(55.763,18.489) 1(55.763,18.507) 1(55.763,18.525) 1(55.763,18.542) 1(55.763,18.56) 1(55.763,18.578) 1(55.763,18.596) 1(55.763,18.613) 1(55.763,18.631) 1(55.763,18.649) 1(55.763,18.667) 1(55.763,18.685) 1(55.763,18.702) 1(55.763,18.72) 1(55.763,18.738) 1(55.763,18.756) 1(55.763,18.773) 1(55.763,18.791) 1(55.763,18.809) 1(55.763,18.827) 1(55.763,18.845) 1(55.763,18.862) 1(55.763,18.88) 1(55.763,18.898) 1(55.763,18.916) 1(55.763,18.933) 1(55.763,18.951) 1(55.763,18.969) 1(55.763,18.987) 1(55.763,19.005) 1(55.763,19.022) 1(55.763,19.04) 1(55.763,19.058) 1(55.763,19.076) 1(55.763,19.094) 1(55.763,19.111) 1(55.763,19.129) 1(55.763,19.147) 1(55.763,19.165) 1(55.763,19.182) 1(55.763,19.2) 1(55.763,19.218) 1(55.763,19.236) 1(55.763,19.254) 1(55.763,19.271) 1(55.763,19.289) 1(55.763,19.307) 1(55.763,19.325) 1(55.763,19.342) 1(55.763,19.36) 1(55.763,19.378) 1(55.763,19.396) 1(55.763,19.414) 1(55.763,19.431) 1(55.763,19.449) 1(55.781,17.902) 1(55.781,18.436) 1(55.781,19.467) 1(55.781,19.485) 1(55.781,19.502) 1(55.781,19.52) 1(55.799,18.453) 1(55.799,19.538) 1(55.816,18.471) 1(55.834,17.92) 1(55.834,18.489) 1(55.834,19.556) 1(55.852,17.938) 1(55.852,18.507) 1(55.87,17.956) 1(55.87,18.525) 1(55.888,17.973) 1(55.888,18.542) 1(55.905,17.991) 1(55.905,18.56) 1(55.923,18.009) 1(55.923,18.578) 1(55.923,18.596) 1(55.941,18.027) 1(55.941,18.613) 1(55.959,18.044) 1(55.959,18.062) 1(55.959,18.631) 1(55.976,18.08) 1(55.976,18.649) 1(55.976,19.574) 1(55.976,19.591) 1(55.976,19.609) 1(55.976,19.627) 1(55.976,19.645) 1(55.976,19.662) 1(55.994,18.098) 1(55.994,18.667) 1(56.012,18.116) 1(56.012,18.685) 1(56.03,18.133) 1(56.03,18.702) 1(56.048,18.151) 1(56.048,18.72) 1(56.065,18.169) 1(56.065,18.738) 1(56.065,18.756) 1(56.076,15.511) 1(56.076,15.529) 1(56.076,15.546) 1(56.076,15.564) 1(56.076,15.582) 1(56.076,15.6) 1(56.076,15.618) 1(56.076,15.635) 1(56.076,15.653) 1(56.076,15.671) 1(56.076,15.689) 1(56.076,15.706) 1(56.076,15.724) 1(56.076,15.742) 1(56.076,15.76) 1(56.076,15.778) 1(56.076,15.795) 1(56.076,15.813) 1(56.076,15.831) 1(56.076,15.849) 1(56.076,15.866) 1(56.076,15.884) 1(56.076,15.902) 1(56.076,15.92) 1(56.076,15.938) 1(56.076,15.955) 1(56.076,15.973) 1(56.076,15.991) 1(56.076,16.009) 1(56.076,16.026) 1(56.076,16.044) 1(56.076,16.062) 1(56.076,16.08) 1(56.076,16.098) 1(56.076,16.115) 1(56.076,16.133) 1(56.076,16.151) 1(56.076,16.169) 1(56.076,16.187) 1(56.076,16.204) 1(56.076,16.222) 1(56.076,16.24) 1(56.076,16.258) 1(56.076,16.275) 1(56.076,16.293) 1(56.076,16.311) 1(56.076,16.329) 1(56.076,16.347) 1(56.076,16.364) 1(56.076,16.382) 1(56.076,16.4) 1(56.076,16.418) 1(56.076,16.435) 1(56.076,16.453) 1(56.076,16.471) 1(56.076,16.489) 1(56.076,16.507) 1(56.076,16.524) 1(56.076,16.542) 1(56.076,16.56) 1(56.076,16.578) 1(56.076,16.595) 1(56.076,16.613) 1(56.076,16.631) 1(56.076,16.649) 1(56.076,16.667) 1(56.076,16.684) 1(56.076,16.702) 1(56.076,16.72) 1(56.076,16.738) 1(56.076,16.755) 1(56.076,16.773) 1(56.076,16.791) 1(56.076,16.809) 1(56.083,18.187) 1(56.083,18.205) 1(56.083,18.773) 1(56.094,15.44) 1(56.094,15.458) 1(56.094,15.475) 1(56.094,15.493) 1(56.094,16.827) 1(56.094,16.844) 1(56.094,16.862) 1(56.094,16.88) 1(56.101,18.222) 1(56.101,18.791) 1(56.112,15.422) 1(56.112,16.898) 1(56.119,18.24) 1(56.119,18.809) 1(56.136,18.258) 1(56.136,18.827) 1(56.154,18.276) 1(56.154,18.845) 1(56.165,15.404) 1(56.165,16.915) 1(56.172,18.293) 1(56.172,18.862) 1(56.19,18.311) 1(56.19,18.329) 1(56.19,18.88) 1(56.19,18.898) 1(56.208,18.347) 1(56.208,18.916) 1(56.225,18.365) 1(56.225,18.933) 1(56.243,18.382) 1(56.243,18.951) 1(56.261,18.4) 1(56.261,18.969) 1(56.279,18.418) 1(56.279,18.987) 1(56.29,15.298) 1(56.29,15.315) 1(56.29,15.333) 1(56.29,15.351) 1(56.29,15.369) 1(56.29,15.386) 1(56.29,16.933) 1(56.29,16.951) 1(56.29,16.969) 1(56.29,16.987) 1(56.29,17.004) 1(56.29,17.022) 1(56.297,18.436) 1(56.297,18.453) 1(56.297,19.005) 1(56.297,19.022) 1(56.314,18.471) 1(56.314,19.04) 1(56.332,18.489) 1(56.332,19.058) 1(56.35,18.507) 1(56.35,19.076) 1(56.368,18.525) 1(56.368,19.094) 1(56.385,18.542) 1(56.385,18.56) 1(56.385,19.111) 1(56.403,18.578) 1(56.403,19.129) 1(56.403,19.147) 1(56.421,18.596) 1(56.421,19.165) 1(56.439,18.613) 1(56.439,19.182) 1(56.457,18.631) 1(56.457,19.2) 1(56.474,18.649) 1(56.474,19.218) 1(56.492,18.667) 1(56.492,18.685) 1(56.492,19.236) 1(56.492,19.254) 1(56.51,18.702) 1(56.51,19.271) 1(56.521,15.76) 1(56.521,15.778) 1(56.521,15.795) 1(56.521,15.813) 1(56.521,15.831) 1(56.521,15.849) 1(56.521,15.866) 1(56.521,15.884) 1(56.521,15.902) 1(56.521,15.92) 1(56.521,15.938) 1(56.521,15.955) 1(56.521,15.973) 1(56.528,18.72) 1(56.528,19.289) 1(56.539,15.689) 1(56.539,15.706) 1(56.539,15.724) 1(56.539,15.742) 1(56.539,15.991) 1(56.539,16.009) 1(56.539,16.026) 1(56.539,16.044) 1(56.545,18.738) 1(56.545,19.307) 1(56.557,15.635) 1(56.557,15.653) 1(56.557,15.671) 1(56.557,16.062) 1(56.557,16.08) 1(56.563,18.756) 1(56.563,19.325) 1(56.563,19.342) 1(56.574,15.6) 1(56.574,15.618) 1(56.574,16.098) 1(56.574,16.115) 1(56.581,18.773) 1(56.581,18.791) 1(56.581,19.36) 1(56.592,15.564) 1(56.592,15.582) 1(56.592,16.133) 1(56.599,18.809) 1(56.599,19.378) 1(56.61,15.546) 1(56.61,16.151) 1(56.61,16.169) 1(56.617,18.827) 1(56.617,19.396) 1(56.628,15.511) 1(56.628,15.529) 1(56.628,16.187) 1(56.628,16.915) 1(56.628,16.933) 1(56.628,16.951) 1(56.628,16.969) 1(56.628,16.987) 1(56.634,18.845) 1(56.634,19.414) 1(56.645,15.493) 1(56.645,16.204) 1(56.645,16.773) 1(56.645,16.791) 1(56.645,16.809) 1(56.645,16.827) 1(56.645,16.844) 1(56.645,16.862) 1(56.645,16.88) 1(56.645,16.898) 1(56.652,18.862) 1(56.652,19.431) 1(56.652,19.449) 1(56.663,15.475) 1(56.663,16.595) 1(56.663,16.613) 1(56.663,16.631) 1(56.663,16.649) 1(56.663,16.667) 1(56.663,16.684) 1(56.663,16.702) 1(56.663,16.72) 1(56.663,16.738) 1(56.663,16.755) 1(56.663,17.004) 1(56.67,18.88) 1(56.67,18.898) 1(56.67,19.467) 1(56.681,15.458) 1(56.681,16.222) 1(56.688,18.916) 1(56.688,19.485) 1(56.699,15.44) 1(56.699,16.24) 1(56.699,17.022) 1(56.705,18.933) 1(56.705,19.502) 1(56.717,15.422) 1(56.723,18.951) 1(56.723,19.52) 1(56.723,19.538) 1(56.734,15.404) 1(56.734,16.258) 1(56.741,18.969) 1(56.741,19.556) 1(56.752,15.386) 1(56.752,17.04) 1(56.759,18.987) 1(56.759,19.005) 1(56.759,19.574) 1(56.77,15.369) 1(56.77,16.275) 1(56.77,16.595) 1(56.77,16.613) 1(56.77,16.631) 1(56.77,16.649) 1(56.77,16.667) 1(56.77,16.684) 1(56.77,16.702) 1(56.77,16.72) 1(56.77,16.738) 1(56.77,16.755) 1(56.777,17.92) 1(56.777,17.938) 1(56.777,17.956) 1(56.777,17.973) 1(56.777,17.991) 1(56.777,18.009) 1(56.777,19.022) 1(56.777,19.591) 1(56.777,19.609) 1(56.788,16.773) 1(56.788,16.791) 1(56.788,16.809) 1(56.794,19.04) 1(56.794,19.627) 1(56.805,15.351) 1(56.805,16.827) 1(56.812,19.058) 1(56.812,19.645) 1(56.823,15.671) 1(56.823,15.689) 1(56.823,15.706) 1(56.823,15.724) 1(56.823,15.742) 1(56.823,15.76) 1(56.823,15.778) 1(56.823,15.795) 1(56.823,16.293) 1(56.823,16.844) 1(56.823,17.058) 1(56.83,19.076) 1(56.83,19.662) 1(56.841,15.333) 1(56.841,15.6) 1(56.841,15.618) 1(56.841,15.635) 1(56.841,15.653) 1(56.841,15.813) 1(56.841,15.831) 1(56.841,15.849) 1(56.841,16.862) 1(56.848,19.094) 1(56.848,19.111) 1(56.859,15.315) 1(56.859,15.564) 1(56.859,15.582) 1(56.859,15.866) 1(56.859,15.884) 1(56.865,19.129) 1(56.877,15.546) 1(56.877,15.902) 1(56.877,16.88) 1(56.883,19.147) 1(56.894,15.511) 1(56.894,15.529) 1(56.894,15.92) 1(56.894,16.311) 1(56.901,18.027) 1(56.901,19.165) 1(56.912,15.298) 1(56.912,15.493) 1(56.912,15.938) 1(56.912,16.898) 1(56.919,19.182) 1(56.919,19.2) 1(56.93,15.475) 1(56.93,17.076) 1(56.937,19.218) 1(56.948,15.458) 1(56.948,15.955) 1(56.954,18.044) 1(56.954,19.236) 1(56.965,15.28) 1(56.965,16.915) 1(56.972,18.062) 1(56.972,18.08) 1(56.972,18.098) 1(56.972,18.116) 1(56.972,18.133) 1(56.972,19.254) 1(56.983,15.44) 1(56.983,15.973) 1(56.99,18.151) 1(56.99,18.169) 1(56.99,18.187) 1(56.99,18.205) 1(56.99,18.222) 1(56.99,18.24) 1(56.99,18.258) 1(56.99,18.276) 1(56.99,18.293) 1(56.99,18.311) 1(56.99,18.329) 1(56.99,18.347) 1(56.99,18.365) 1(56.99,18.382) 1(56.99,18.4) 1(56.99,18.418) 1(56.99,18.436) 1(56.99,18.453) 1(56.99,18.471) 1(56.99,18.489) 1(56.99,18.507) 1(56.99,18.525) 1(56.99,18.542) 1(56.99,18.56) 1(56.99,18.578) 1(56.99,18.596) 1(56.99,18.613) 1(56.99,18.631) 1(56.99,18.649) 1(56.99,18.667) 1(56.99,18.685) 1(56.99,18.702) 1(56.99,18.72) 1(56.99,18.738) 1(56.99,18.756) 1(56.99,18.773) 1(56.99,18.791) 1(56.99,18.809) 1(56.99,18.827) 1(56.99,18.845) 1(56.99,18.862) 1(56.99,18.88) 1(56.99,18.898) 1(56.99,18.916) 1(56.99,18.933) 1(56.99,18.951) 1(56.99,18.969) 1(56.99,18.987) 1(56.99,19.005) 1(56.99,19.022) 1(56.99,19.04) 1(56.99,19.058) 1(56.99,19.076) 1(56.99,19.094) 1(56.99,19.111) 1(56.99,19.129) 1(56.99,19.147) 1(56.99,19.165) 1(56.99,19.182) 1(56.99,19.2) 1(56.99,19.218) 1(56.99,19.236) 1(56.99,19.254) 1(57.001,15.422) 1(57.001,16.329) 1(57.019,15.262) 1(57.037,15.991) 1(57.037,16.933) 1(57.054,15.404) 1(57.108,15.386) 1(57.108,16.009) 1(57.108,16.347) 1(57.126,15.244) 1(57.132,18.151) 1(57.132,18.169) 1(57.132,18.187) 1(57.132,18.205) 1(57.132,18.222) 1(57.132,18.24) 1(57.132,18.258) 1(57.132,18.276) 1(57.132,18.293) 1(57.132,18.311) 1(57.132,18.329) 1(57.132,18.347) 1(57.132,18.365) 1(57.132,18.382) 1(57.132,18.4) 1(57.132,18.418) 1(57.132,18.436) 1(57.132,18.453) 1(57.132,18.471) 1(57.132,18.489) 1(57.132,18.507) 1(57.132,18.525) 1(57.132,18.542) 1(57.132,18.56) 1(57.132,18.578) 1(57.132,18.596) 1(57.132,18.613) 1(57.132,18.631) 1(57.132,18.649) 1(57.132,18.667) 1(57.132,18.685) 1(57.132,18.702) 1(57.132,18.72) 1(57.132,18.738) 1(57.132,18.756) 1(57.132,18.773) 1(57.132,18.791) 1(57.132,18.809) 1(57.132,18.827) 1(57.132,18.845) 1(57.132,18.862) 1(57.132,18.88) 1(57.132,18.898) 1(57.132,18.916) 1(57.132,18.933) 1(57.132,18.951) 1(57.132,18.969) 1(57.132,18.987) 1(57.132,19.005) 1(57.132,19.022) 1(57.132,19.04) 1(57.132,19.058) 1(57.132,19.076) 1(57.132,19.094) 1(57.132,19.111) 1(57.132,19.129) 1(57.132,19.147) 1(57.132,19.165) 1(57.132,19.182) 1(57.132,19.2) 1(57.132,19.218) 1(57.132,19.236) 1(57.132,19.254) 1(57.132,19.271) 1(57.132,19.289) 1(57.132,19.307) 1(57.132,19.325) 1(57.132,19.342) 1(57.132,19.36) 1(57.132,19.378) 1(57.132,19.396) 1(57.132,19.414) 1(57.132,19.431) 1(57.15,18.062) 1(57.15,18.08) 1(57.15,18.098) 1(57.15,18.116) 1(57.15,18.133) 1(57.15,19.449) 1(57.15,19.467) 1(57.15,19.485) 1(57.15,19.502) 1(57.15,19.52) 1(57.168,18.044) 1(57.168,19.538) 1(57.214,16.026) 1(57.214,16.364) 1(57.221,18.027) 1(57.221,19.556) 1(57.232,16.933) 1(57.25,17.076) 1(57.286,16.382) 1(57.286,16.915) 1(57.321,15.386) 1(57.321,16.044) 1(57.321,16.898) 1(57.339,16.4) 1(57.339,17.058) 1(57.346,17.92) 1(57.346,17.938) 1(57.346,17.956) 1(57.346,17.973) 1(57.346,17.991) 1(57.346,18.009) 1(57.346,19.574) 1(57.346,19.591) 1(57.346,19.609) 1(57.346,19.627) 1(57.346,19.645) 1(57.346,19.662) 1(57.357,16.88) 1(57.374,16.418) 1(57.374,16.862) 1(57.392,15.404) 1(57.392,16.062) 1(57.392,16.435) 1(57.392,16.844) 1(57.41,15.244) 1(57.41,16.453) 1(57.41,16.827) 1(57.41,17.04) 1(57.428,16.471) 1(57.428,16.809) 1(57.446,15.422) 1(57.446,16.489) 1(57.446,16.773) 1(57.446,16.791) 1(57.446,17.022) 1(57.463,16.08) 1(57.463,16.507) 1(57.463,16.524) 1(57.463,16.542) 1(57.463,16.72) 1(57.463,16.738) 1(57.463,16.755) 1(57.481,15.44) 1(57.481,16.56) 1(57.481,16.578) 1(57.481,16.595) 1(57.481,16.613) 1(57.481,16.631) 1(57.481,16.649) 1(57.481,16.667) 1(57.481,16.684) 1(57.481,16.702) 1(57.499,17.004) 1(57.517,15.262) 1(57.517,15.458) 1(57.517,16.098) 1(57.517,16.987) 1(57.541,18.293) 1(57.541,18.311) 1(57.541,18.329) 1(57.552,15.475) 1(57.552,16.115) 1(57.552,16.969) 1(57.559,18.151) 1(57.559,18.169) 1(57.559,18.187) 1(57.559,18.205) 1(57.559,18.222) 1(57.559,18.24) 1(57.559,18.258) 1(57.559,18.276) 1(57.57,15.493) 1(57.57,16.951) 1(57.577,17.92) 1(57.577,17.938) 1(57.577,17.956) 1(57.577,17.973) 1(57.577,17.991) 1(57.577,18.009) 1(57.577,18.027) 1(57.577,18.044) 1(57.577,18.062) 1(57.577,18.08) 1(57.577,18.098) 1(57.577,18.116) 1(57.577,18.133) 1(57.588,15.28) 1(57.588,15.511) 1(57.588,16.133) 1(57.606,15.529) 1(57.606,16.933) 1(57.612,19.591) 1(57.612,19.609) 1(57.612,19.627) 1(57.612,19.645) 1(57.612,19.662) 1(57.623,15.546) 1(57.623,16.151) 1(57.623,16.915) 1(57.63,19.431) 1(57.63,19.449) 1(57.63,19.467) 1(57.63,19.485) 1(57.63,19.502) 1(57.63,19.52) 1(57.63,19.538) 1(57.63,19.556) 1(57.63,19.574) 1(57.641,15.298) 1(57.641,15.564) 1(57.641,15.582) 1(57.641,15.6) 1(57.641,15.618) 1(57.641,16.169) 1(57.641,16.898) 1(57.648,18.293) 1(57.648,18.311) 1(57.648,18.329) 1(57.648,19.289) 1(57.648,19.307) 1(57.648,19.325) 1(57.648,19.342) 1(57.648,19.36) 1(57.648,19.378) 1(57.648,19.396) 1(57.648,19.414) 1(57.659,15.635) 1(57.659,15.653) 1(57.659,15.671) 1(57.659,15.689) 1(57.659,15.706) 1(57.659,15.724) 1(57.659,15.742) 1(57.659,15.76) 1(57.659,15.778) 1(57.659,15.795) 1(57.659,16.187) 1(57.659,16.88) 1(57.666,18.187) 1(57.666,18.205) 1(57.666,18.222) 1(57.666,18.24) 1(57.666,18.258) 1(57.666,18.276) 1(57.677,16.204) 1(57.677,16.844) 1(57.677,16.862) 1(57.683,18.116) 1(57.683,18.133) 1(57.683,18.151) 1(57.683,18.169) 1(57.694,15.315) 1(57.694,16.222) 1(57.694,16.827) 1(57.701,18.098) 1(57.712,16.24) 1(57.712,16.791) 1(57.712,16.809) 1(57.73,15.333) 1(57.73,16.258) 1(57.73,16.275) 1(57.73,16.755) 1(57.73,16.773) 1(57.737,18.08) 1(57.748,16.293) 1(57.748,16.311) 1(57.748,16.329) 1(57.748,16.702) 1(57.748,16.72) 1(57.748,16.738) 1(57.754,19.289) 1(57.754,19.307) 1(57.754,19.325) 1(57.754,19.342) 1(57.754,19.36) 1(57.754,19.378) 1(57.754,19.396) 1(57.754,19.414) 1(57.754,19.431) 1(57.754,19.449) 1(57.766,15.351) 1(57.766,15.564) 1(57.766,15.582) 1(57.766,15.6) 1(57.766,15.618) 1(57.766,15.635) 1(57.766,15.653) 1(57.766,15.671) 1(57.766,15.689) 1(57.766,15.706) 1(57.766,15.724) 1(57.766,15.742) 1(57.766,15.76) 1(57.766,15.778) 1(57.766,15.795) 1(57.766,16.347) 1(57.766,16.364) 1(57.766,16.382) 1(57.766,16.4) 1(57.766,16.631) 1(57.766,16.649) 1(57.766,16.667) 1(57.766,16.684) 1(57.772,18.542) 1(57.772,18.56) 1(57.772,18.578) 1(57.772,18.596) 1(57.772,18.613) 1(57.772,18.631) 1(57.772,18.649) 1(57.772,18.667) 1(57.772,18.685) 1(57.772,18.702) 1(57.772,18.72) 1(57.772,18.738) 1(57.772,18.756) 1(57.772,18.773) 1(57.772,18.791) 1(57.772,18.809) 1(57.772,18.827) 1(57.772,18.845) 1(57.772,18.862) 1(57.772,18.88) 1(57.772,18.898) 1(57.772,18.916) 1(57.772,18.933) 1(57.772,18.951) 1(57.772,18.969) 1(57.772,18.987) 1(57.772,19.005) 1(57.772,19.022) 1(57.772,19.04) 1(57.772,19.058) 1(57.772,19.076) 1(57.772,19.094) 1(57.772,19.467) 1(57.772,19.485) 1(57.783,15.369) 1(57.783,15.44) 1(57.783,15.458) 1(57.783,15.475) 1(57.783,15.493) 1(57.783,15.511) 1(57.783,15.529) 1(57.783,15.546) 1(57.783,16.418) 1(57.783,16.435) 1(57.783,16.453) 1(57.783,16.471) 1(57.783,16.489) 1(57.783,16.507) 1(57.783,16.524) 1(57.783,16.542) 1(57.783,16.56) 1(57.783,16.578) 1(57.783,16.595) 1(57.783,16.613) 1(57.79,19.502) 1(57.801,15.386) 1(57.801,15.404) 1(57.801,15.422) 1(57.843,18.062) 1(57.879,18.542)